# Allegro board CY8CKIT-042_Layout.brd
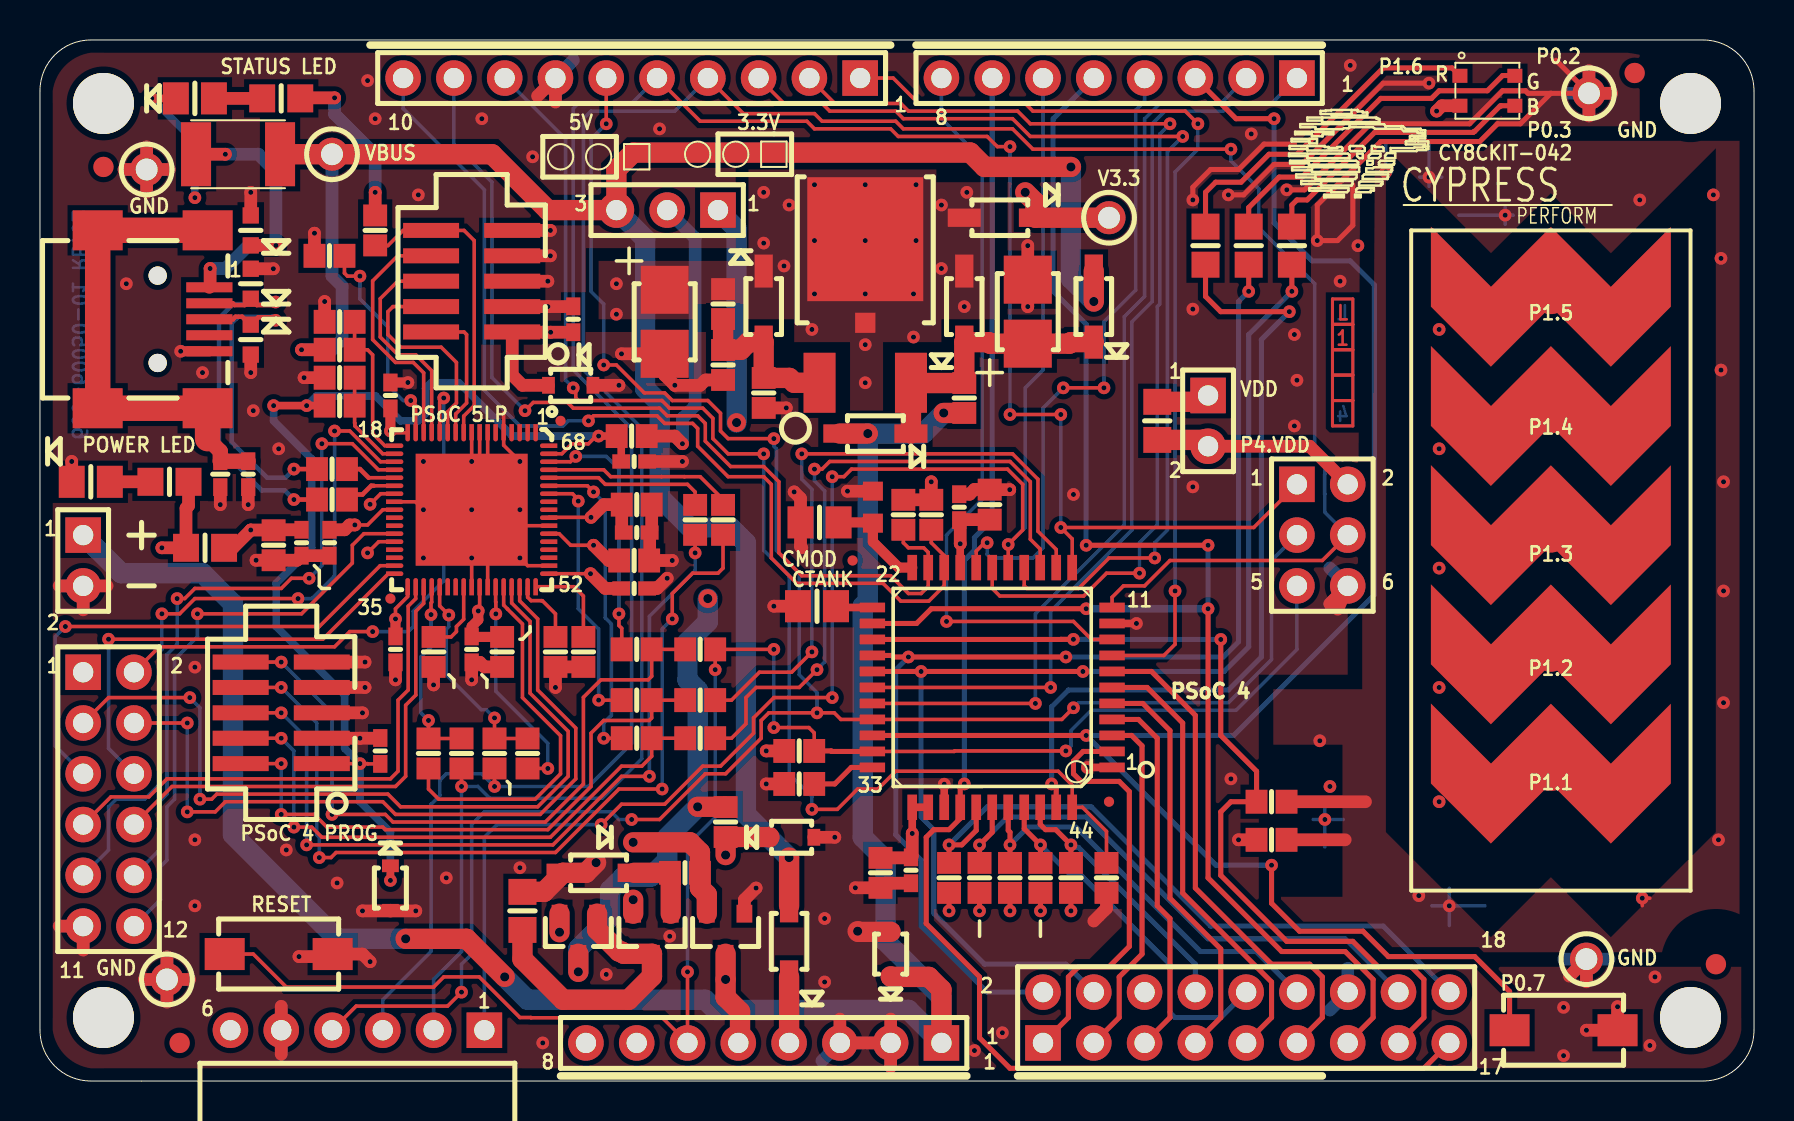
[diagram p0: board, top side]
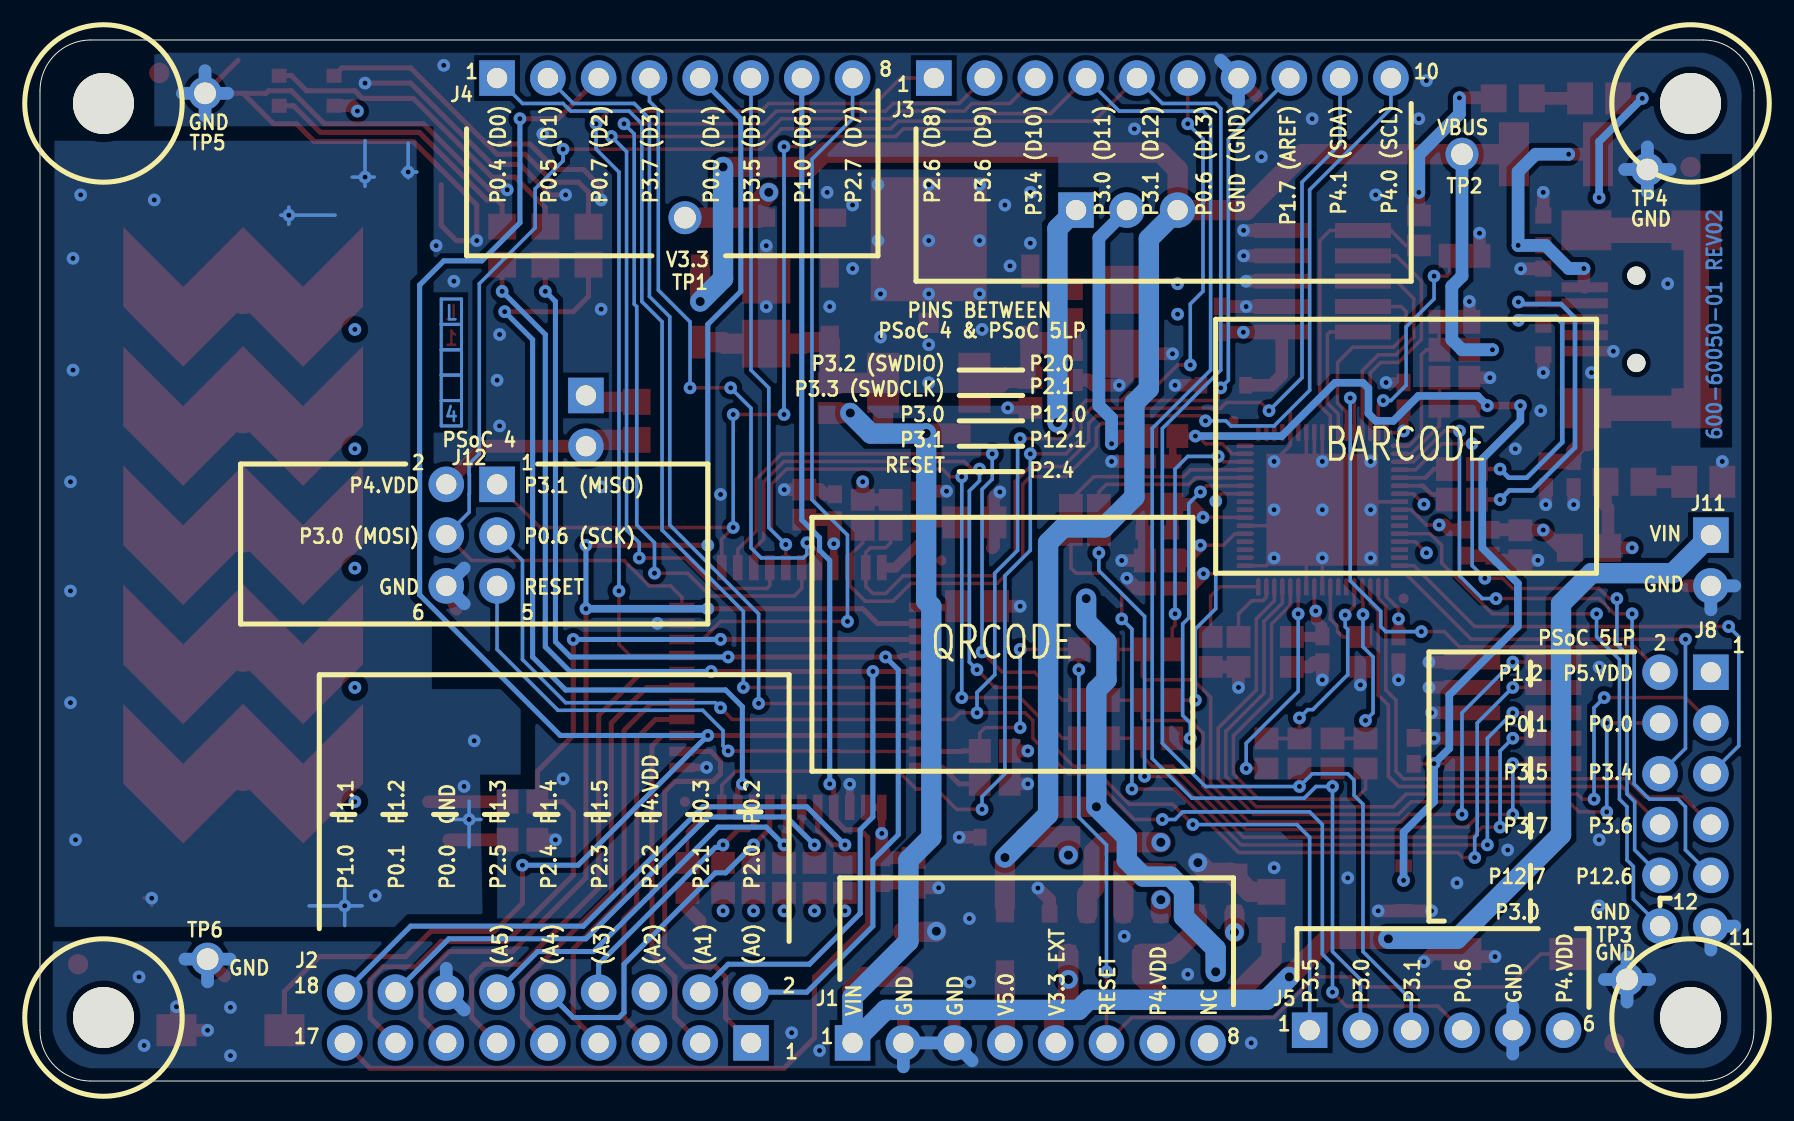
[diagram p1: board, bottom side, seen from below]

Outline 85.72 x 52.07 mm; copper layers: TOP, GND, VCC, BOTTOM. Coordinates in mm from the lower left corner of the outline.

## Placement (name value [footprint] x y rotation side)
C1  2200 pF  [C-CC0805]  38.99 27.94 180 top
C2  0.1 uF  [C-CC0402]  43.56 10.54 270 top
C3  1.0 uF  [C-CC0603]  42.04 10.41 270 top
C4  10 uFd 25v  [C-PCC3528]  49.4 38.48 90 top
C5  1.0 uF  [C-CC0603]  37.97 14.86 180 top
C6  22 uFd 16v  [C-PCC3528]  31.24 37.97 270 top
C7  0.1 uF  [C-CC0402]  45.97 28.7 90 top
C8  1.0 uF  [C-CC0603]  47.5 28.83 90 top
C9  2200 pF  [C-CC0805]  38.86 23.75 180 top
C10  1.0 uF  [C-CC0603]  53.34 10.16 90 top
C11  1.0 uF  [C-CC0603]  29.85 28.83 0 top
C12  0.1 uF  [C-CC0402]  29.85 27.43 0 top
C13  1.0 uF  [C-CC0603]  29.72 26.04 180 top
C14  0.1 uF  [C-CC0402]  29.72 30.99 0 top
C15  0.1 uF  [C-CC0402]  29.72 24.64 0 top
C16  0.01 uF  [C-CC0402]  10.41 30.35 270 top
C17  0.1 uF  [C-CC0402]  21.59 21.59 270 top
C18  1.0 uF  [C-CC0603]  23.11 21.46 270 top
C19  1.0 uF  [C-CC0603]  19.69 21.46 270 top
C20  0.1 uF  [C-CC0402]  17.53 34.29 90 top
C21  0.1 uF  [C-CC0402]  17.78 21.59 270 top
C22  0.1 uF  [C-CC0402]  14.48 26.92 270 top
C23  1.0 uF  [C-CC0603]  11.68 26.8 270 top
C24  0.1 uF  [C-CC0402]  13.08 26.92 270 top
C25  0.1 uF  [C-CC0402]  17.02 16.51 90 top
C26  1.0 uF  [C-CC0603]  36.2 34.42 270 top
C27  0.1 uF  [C-CC0402]  26.67 38.1 90 top
C28  1.0 uF  [C-CC0603]  25.78 21.46 270 top
C29  1.0 uF  [C-CC0603]  27.18 21.46 270 top
CSS1  CapSense Slider 5 Seg  [CSS5A-300MIL_4MMSHAPE]  75.56 27.3 270 top
D1  MBR0520L  [SOD-123]  46.23 38.73 90 top
D2  MBR0520L  [SOD-123]  52.7 38.73 90 top
D3  Power LED  [CR-LED0805]  2.54 29.97 0 top
D4  MBR0520L  [SOD-123]  37.46 6.98 90 top
D5  Vz=2V(BZT52C2V0-7-F)  [SOD-123-R]  27.94 10.41 180 top
D6  ESD 5VDC  [CR-LED0603]  10.54 42.54 90 top
D7  ESD 5VDC  [CR-LED0603]  10.54 39.88 90 top
D8  ESD 5VDC  [CR-LED0603]  10.54 37.08 270 top
D9  RGB LED  [LED_PLCC4_SMD]  72.39 49.53 0 top
D10  Status LED Green  [CR-LED0805]  7.75 49.15 0 top
D11  MBR0520L  [SOD-123]  48.01 43.18 180 top
D12  MBR0520L  [SOD-123]  36.2 38.73 270 top
D13  MBR0520L  [SOD-123]  41.78 32.38 180 top
F1  PTC Resettable Fuse  [FUSE_MF-MSMF050-2]  9.91 46.35 0 top
J1  8x1 RECP  [RECP8X1-VERT]  45.08 1.9 270 top
J2  9x2 RECP  [RECEPT_9X2_100MI]  50.16 1.9 90 top
J3  10X1 RECP  [RECP10X1-VERT]  41.02 50.16 270 top
J4  8x1 RECP  [RECP8X1-VERT]  62.86 50.16 270 top
J5  6X1 CONN FEMALE  [RECP6X1-RA]  22.23 2.54 180 top
J6  50MIL KEYED SMD  [FTSH-105-XX-X-DV-K]  12.07 18.41 90 top
J7  50MIL KEYED SMD  [FTSH-105-XX-X-DV-K]  21.59 40 90 top
J8  6x2 RECPT  [RECPT6X2_100]  2.16 20.45 0 top
J9  3p_jumper  [HDR3X1]  33.91 43.56 180 top
J10  USB MINI B  [J-ACON-MINIABSMT]  0.63 38.1 90 top
J11  2 PIN HDR  [HDR2]  2.16 27.3 180 top
J12  3x2 RECPT  [RECPT3X2_100]  62.86 29.85 0 top
J13  2 PIN HDR  [HDR2]  58.42 34.29 180 top
NOREF  -  []  2.54 52.07 0 top
NOREF#2  -  []  85.72 2.54 0 top
NOREF#3  -  []  193.68 -156.84 0 top
NOREF#4  -  [unnamed#2]  40.64 26.04 0 top
NOREF#5  -  [unnamed#4]  6.98 1.9 0 top
NOREF#6  -  []  3.17 3.17 0 top
NOREF#7  -  [unnamed#4]  83.82 5.84 0 top
NOREF#8  -  []  3.17 3.17 0 top
NOREF#9  -  []  0 2.54 0 top
NOREF#10  -  []  127.51 -114.68 0 top
NOREF#11  -  [unnamed#4]  3.17 45.72 0 top
NOREF#12  -  []  61.59 34.29 0 top
NOREF#13  -  []  -238.12 -233.04 0 top
NOREF#14  -  []  82.55 3.17 0 top
NOREF#15  -  [unnamed#2]  17.53 24.13 0 top
NOREF#16  -  [unnamed#3]  3.17 3.17 0 top
NOREF#17  -  [unnamed#2]  53.47 13.97 0 top
NOREF#18  -  []  3.17 48.89 0 top
NOREF#19  -  []  85.04 51.27 0 top
NOREF#20  -  []  5.08 0 0 top
NOREF#21  -  []  193.68 -156.84 0 top
NOREF#22  -  [unnamed#4]  79.76 50.42 0 top
NOREF#23  -  []  65.41 44.07 0 top
NOREF#24  -  [unnamed#2]  26.04 33.02 0 top
NOREF#25  -  []  82.55 48.89 180 bottom
NOREF#26  -  []  -111.12 -156.84 180 bottom
NOREF#27  -  []  3.17 48.89 180 bottom
NOREF#28  -  []  3.17 3.17 180 bottom
NOREF#29  -  []  82.55 3.17 180 bottom
NOREF#30  -  []  37.59 21.84 180 bottom
NOREF#31  -  []  17.4 31.75 180 bottom
Q1  PMOS( DMP3098L-7)  [SOT23-3098L]  34.29 7.37 180 top
Q2  PMOS( DMP3098L-7)  [SOT23-3098L]  26.92 7.37 180 top
Q3  PMOS( DMP3098L-7)  [SOT23-3098L]  30.61 7.37 180 top
R1  NO LOAD  [RESC1608X50AN]  41.66 28.7 270 top
R2  ZERO  [R-CR0603]  46.23 34.16 90 top
R3  330 ohm  [R-CR0805]  6.48 29.97 180 top
R4  ZERO  [R-CR0603]  29.59 32.26 0 top
R5  ZERO  [R-CR0805]  8.25 26.67 0 top
R6  ZERO  [R-CR0805]  55.88 33.02 270 top
R7  ZERO  [R-CR0603]  14.48 41.27 180 top
R8  2.2K  [R-CR0603]  43.18 28.32 270 top
R9  2.2K  [R-CR0603]  44.58 28.32 270 top
R10  4.7K  [R-CR0603]  37.97 16.51 0 top
R11  ZERO  [R-CR0603]  29.85 21.59 0 top
R12  ZERO  [R-CR0603]  34.16 28.07 270 top
R13  100K  [R-CR0402]  9.02 30.35 270 top
R14  ZERO  [R-CR0603]  32.77 28.07 270 top
R15  ZERO  [R-CR0603]  29.85 17.14 0 top
R16  ZERO  [R-CR0603]  29.85 19.05 0 top
R17  560 ohm  [R-CR0603]  45.47 10.16 90 top
R18  560 ohm  [R-CR0603]  46.99 10.16 90 top
R19  560 ohm  [R-CR0603]  48.51 10.16 90 top
R20  560 ohm  [R-CR0603]  50.04 10.16 90 top
R21  560 ohm  [R-CR0603]  51.56 10.16 90 top
R22  2.2K  [R-CR0603]  24.38 16.38 90 top
R23  2.2K  [R-CR0603]  19.43 16.38 90 top
R24  ZERO  [R-CR0603]  22.73 16.38 270 top
R25  ZERO  [R-CR0603]  21.08 16.38 270 top
R26  22E  [R-CR0603]  14.61 30.61 0 top
R27  22E  [R-CR0603]  14.61 29.08 0 top
R28  2.2K  [R-CR0805]  58.29 41.78 270 top
R29  560 ohm  [R-CR0805]  60.45 41.78 90 top
R30  560 ohm  [R-CR0805]  62.61 41.78 90 top
R31  330 ohm  [R-CR0805]  12.07 49.15 180 top
R32  ZERO  [R-CR0603]  33.02 19.05 0 top
R33  ZERO  [R-CR0603]  33.02 17.14 0 top
R34  ZERO  [R-CR0603]  33.02 21.59 0 top
R35  240 ohm  [R-CR0603]  34.16 35.81 90 top
R36  120 ohm  [R-CR0603]  34.16 38.86 90 top
R37  1.5K  [R-CR0603]  14.99 33.78 0 top
R38  3K  [R-CR0603]  14.99 35.18 180 top
R39  1.5K  [R-CR0603]  14.99 36.58 0 top
R40  3K  [R-CR0603]  14.99 37.97 180 top
R41  4.7K  [R-CR0603]  16.76 42.54 270 top
R42  1K ohm  [0805]  24.13 8.51 90 top
R43  442 ohm  [R-CR0603]  32.26 10.41 180 top
R44  ZERO  [R-CR0603]  61.59 13.97 0 top
R45  ZERO  [R-CR0603]  61.59 12.07 0 top
R46  ZERO  [R-CR0603]  34.29 12.95 90 top
SW1  EVQ-PE105K  [SWITCH-EVQ-PE105K_5MM]  11.94 6.35 0 top
SW2  EVQ-PE105K  [SWITCH-EVQ-PE105K_5MM]  76.2 2.54 0 top
TP1  RED  [TP-43R_S]  53.47 43.18 0 top
TP2  RED  [TP-43R_S]  14.61 46.35 0 top
TP3  BLACK  [TP-43R_S]  6.35 5.08 0 top
TP4  BLACK  [TP-43R_S]  5.33 45.59 0 top
TP5  BLACK  [TP-43R_S]  77.47 49.4 0 top
TP6  BLACK  [TP-43R_S]  77.34 6.1 0 top
TVS1  5V 350W  [SOD323]  17.53 9.65 270 top
TVS2  5V 350W  [SOD323]  26.54 34.8 0 top
TVS3  5V 350W  [SOD323]  37.59 12.19 0 top
TVS4  18V 350W  [SOD323]  42.54 6.35 90 top
U1  NCP1117DTARKG  [DPAK_4PIN]  41.27 34.92 0 top
U2  CY8C4245AXI-483 44TQFP  [TQFP44]  47.62 19.69 180 top
U3  CY8C5868LTI-LP039 QFN68  [QFN68_8X8MM]  21.59 28.57 270 top

## Library data of the parts
C1 = CAP
C2 C7 C12 C14 C15 C17 C20-C22 C24 C25 C27 = 0.1 uFd 0402: alternate symbols: (C-CC0402_A)
C3 C5 C8 C10 C11 C13 C18 C19 C23 C26 C28 C29 = 1_0.0 uFd 0603 X5R 25V 10%: alternate symbols: (C-CC0603_A)
C4 C6 = 10 uFd Tantalum 16v 3216_2
C9 = CAP: alternate symbols: (CAPC2012X140N,CAPC2012X140L,CAPC2012X140M)
C16 = 0_0.01 uFd 0402 X7R
CSS1 = CapSense Slider 5 Seg EXTEND
D1 D2 D4 D11-D13 = TMP_134158
D3 D10 = LED Green 0805
D5 = DIODE BREAKDOWN
D6-D8 = ESD 5VDC 0603
D9 = RGB_LED
F1 = FUSE
J1 J4 = 8x1 RECPT VERT_0
J2 = RECEPT 9X2 100 MIL
J3 = RCP 12x1 _0.100 GOLD TH
J5 = RECEPT 6x1  RA 100 MIL
J6 J7 = 10 Pin Header 50mil Keyed SMD
J8 = RECPT 4X2 100MIL_1
J9 = 3p_jumper
J10 = USB MINI AB Right Angle
J11 = 2 PIN Header _0
J12 = RECPT 4X2 100MIL_2
J13 = 2 PIN Header
Q1 = P DGS_1
Q2 Q3 = P DGS_2
R1 = RES
R2 R4 R7 R11 R12 R14-R16 R24 R25 R32-R34 R44-R46 = Zero ohm 0603_2: alternate symbols: (R-CR0603_A)
R3 R31 = 330 ohm 5% 0805_0
R5 R6 = 330 ohm 5% 0805_1
R8 R9 R22 R23 = 2_0.2K ohm 5% 0603: alternate symbols: (R-CR0603_A)
R10 R41 = 4.7K ohm 5% 0603: alternate symbols: (R-CR0603_A)
R13 = 100K ohm 5% 0402: alternate symbols: (R-CR0402_A)
R17-R21 R28-R30 R35-R40 R42 R43 = RESISTOR
R26 R27 = 24 ohm 5% 0603 _0
SW1 SW2 = SWITCH EVQ-PE105K 5.0mm
TP1-TP6 = TEST_POINT
TVS1-TVS4 = TVS 5V SOD-323_0
U1 = LM1117MPX-3_1.3 SOT223
U2 = PSOC4A_44_TQFP_1: alternate symbols: (tqfpa100)
U3 = CY8C5667LTI-LP008 QFN68

## Footprints (pads in the part's own frame, mm; a bottom-side part is the same pattern mirrored in y, then rotated)
0805
  rect 1.295x1.397 smd: 1(-0.953,0) 2(0.953,0)
C-CC0402
  rect 0.889x0.711 smd: 1(-0.648,0) 2(0.648,0)
C-CC0603
  rect 1.092x1.194 smd: 1(-0.749,0) 2(0.749,0)
C-CC0805
  rect 1.295x1.6 smd: 1(-0.953,0) 2(0.953,0)
C-PCC3528
  rect 2.4x2.4 smd: 1(-1.6,0) 2(1.6,0)
CR-LED0603
  rect 0.813x0.813 smd: 1(-0.749,0) 2(0.749,0)
CR-LED0805
  rect 1.295x1.6 smd: 1(-0.953,0) 2(0.953,0)
CSS5A-300MIL_4MMSHAPE
  custom 7x11.999 smd: 1(11.925,0) 2(5.961,0) 3(0,0) 4(-5.961,0) 5(-11.925,0)
DPAK_4PIN
  rect 1.6x3 smd: 1(-2.286,0) 3(2.286,0)
  rect 1.011x1.011 smd: 2(0,3)
  rect 5.799x6.2 smd: 4(0,7.181)
FTSH-105-XX-X-DV-K
  rect 0.749x2.799 smd: 1(-2.54,-2.029) 2(-2.54,2.029) 3(-1.27,-2.029) 4(-1.27,2.029) 5(0,-2.029) 6(0,2.029) 7(1.27,-2.029) 8(1.27,2.029) 9(2.54,-2.029) 10(2.54,2.029)
FUSE_MF-MSMF050-2
  rect 1.501x3.2 smd: 1(-2.101,0) 2(2.101,0)
HDR2
  rect 1.778x1.778 hole 1.016: 1(0,0)
  round 1.778 hole 1.016: 2(0,2.54)
HDR3X1
  rect 1.778x1.778 hole 1.016: 1(0,0)
  round 1.778 hole 1.016: 2(2.54,0) 3(5.08,0)
J-ACON-MINIABSMT
  round 0.914 hole 0.914 unplated: (-2.184,-5.25) (2.184,-5.25)
  rect 0.5x2.311 smd: 1(1.6,-7.836) 2(0.8,-7.836) 3(0,-7.836) 4(-0.8,-7.836) 5(-1.6,-7.836)
  rect 1.999x2.499 smd: 6(4.45,-2.25) 7(4.45,-7.75) 8(-4.45,-2.25) 9(-4.45,-7.75)
LED_PLCC4_SMD
  rect 0.749x0.701 smd: 1(-1.374,0.749) 2(-1.374,-0.749) 3(1.374,-0.749) 4(1.374,0.749)
QFN68_8X8MM
  custom 0.864x0.23 smd: 1(-3.851,3.2) 2(-3.851,2.799) 3(-3.851,2.4) 4(-3.851,1.999) 5(-3.851,1.6) 6(-3.851,1.199) 7(-3.851,0.8) 8(-3.851,0.399) 9(-3.851,0) 10(-3.851,-0.399) 11(-3.851,-0.8) 12(-3.851,-1.199) 13(-3.851,-1.6) 14(-3.851,-1.999) 15(-3.851,-2.4) 16(-3.851,-2.799) 17(-3.851,-3.2) 35(3.851,-3.2) 36(3.851,-2.799) 37(3.851,-2.4) 38(3.851,-1.999) 39(3.851,-1.6) 40(3.851,-1.199) 41(3.851,-0.8) 42(3.851,-0.399) 43(3.851,0) 44(3.851,0.399) 45(3.851,0.8) 46(3.851,1.199) 47(3.851,1.6) 48(3.851,1.999) 49(3.851,2.4) 50(3.851,2.799) 51(3.851,3.2)
  custom 0.23x0.864 smd: 18(-3.2,-3.851) 19(-2.799,-3.851) 20(-2.4,-3.851) 21(-1.999,-3.851) 22(-1.6,-3.851) 23(-1.199,-3.851) 24(-0.8,-3.851) 25(-0.399,-3.851) 26(0,-3.851) 27(0.399,-3.851) 28(0.8,-3.851) 29(1.199,-3.851) 30(1.6,-3.851) 31(1.999,-3.851) 32(2.4,-3.851) 33(2.799,-3.851) 34(3.2,-3.851) 52(3.2,3.851) 53(2.799,3.851) 54(2.4,3.851) 55(1.999,3.851) 56(1.6,3.851) 57(1.199,3.851) 58(0.8,3.851) 59(0.399,3.851) 60(0,3.851) 61(-0.399,3.851) 62(-0.8,3.851) 63(-1.199,3.851) 64(-1.6,3.851) 65(-1.999,3.851) 66(-2.4,3.851) 67(-2.799,3.851) 68(-3.2,3.851)
  rect 5.601x5.601 smd: 69(0,0)
R-CR0402
  rect 0.889x0.711 smd: 1(-0.648,0) 2(0.648,0)
R-CR0603
  rect 1.092x1.194 smd: 1(-0.749,0) 2(0.749,0)
R-CR0805
  rect 1.295x1.397 smd: 1(-0.953,0) 2(0.953,0)
RECEPT_9X2_100MI
  rect 1.778x1.778 hole 1.016: 1(0,0)
  round 1.778 hole 1.016: 2(2.54,0) 3(0,-2.54) 4(2.54,-2.54) 5(0,-5.08) 6(2.54,-5.08) 7(0,-7.62) 8(2.54,-7.62) 9(0,-10.16) 10(2.54,-10.16) 11(0,-12.7) 12(2.54,-12.7) 13(0,-15.24) 14(2.54,-15.24) 15(0,-17.78) 16(2.54,-17.78) 17(0,-20.32) 18(2.54,-20.32)
RECP6X1-RA
  rect 1.778x1.778 hole 1.016: 1(0,0)
  round 1.778 hole 1.016: 2(2.54,0) 3(5.08,0) 4(7.62,0) 5(10.16,0) 6(12.7,0)
RECP8X1-VERT
  rect 1.778x1.778 hole 1.016: 1(0,0)
  round 1.778 hole 1.016: 2(0,-2.54) 3(0,-5.08) 4(0,-7.62) 5(0,-10.16) 6(0,-12.7) 7(0,-15.24) 8(0,-17.78)
RECP10X1-VERT
  rect 1.778x1.778 hole 1.016: 1(0,0)
  round 1.778 hole 1.016: 2(0,-2.54) 3(0,-5.08) 4(0,-7.62) 5(0,-10.16) 6(0,-12.7) 7(0,-15.24) 8(0,-17.78) 9(0,-20.32) 10(0,-22.86)
RECPT3X2_100
  rect 1.778x1.778 hole 1.016: 1(0,0)
  round 1.778 hole 1.016: 2(2.54,0) 3(0,-2.54) 4(2.54,-2.54) 5(0,-5.08) 6(2.54,-5.08)
RECPT6X2_100
  rect 1.778x1.778 hole 1.016: 1(0,0)
  round 1.778 hole 1.016: 2(2.54,0) 3(0,-2.54) 4(2.54,-2.54) 5(0,-5.08) 6(2.54,-5.08) 7(0,-7.62) 8(2.54,-7.62) 9(0,-10.16) 10(2.54,-10.16) 11(0,-12.7) 12(2.54,-12.7)
RESC1608X50AN
  rect 0.95x1.001 smd: 1(-0.8,0) 2(0.8,0)
SOD323
  rect 0.635x0.838 smd: 1(-1.113,0) 2(1.113,0)
SOD-123
  rect 1.651x0.914 smd: 1(-1.778,0) 2(1.778,0)
SOD-123-R
  rect 1.651x0.914 smd: 1(1.778,0) 2(-1.778,0)
SOT23-3098L
  rect 0.787x0.889 smd: 1(0,1.003) 2(-0.94,-1.003) 3(0.94,-1.003)
SWITCH-EVQ-PE105K_5MM
  rect 1.999x1.6 smd: 1(-2.7,0) 2(2.7,0)
TP-43R_S
  round 1.651 hole 1.092: 1(0,0)
TQFP44
  rect 1.27x0.483 smd: 1(-5.994,4) 2(-5.994,3.2) 3(-5.994,2.4) 4(-5.994,1.6) 5(-5.994,0.8) 6(-5.994,0) 7(-5.994,-0.8) 8(-5.994,-1.6) 9(-5.994,-2.4) 10(-5.994,-3.2) 11(-5.994,-4) 23(5.994,-4) 24(5.994,-3.2) 25(5.994,-2.4) 26(5.994,-1.6) 27(5.994,-0.8) 28(5.994,0) 29(5.994,0.8) 30(5.994,1.6) 31(5.994,2.4) 32(5.994,3.2) 33(5.994,4)
  rect 0.483x1.27 smd: 12(-4,-5.994) 13(-3.2,-5.994) 14(-2.4,-5.994) 15(-1.6,-5.994) 16(-0.8,-5.994) 17(0,-5.994) 18(0.8,-5.994) 19(1.6,-5.994) 20(2.4,-5.994) 21(3.2,-5.994) 22(4,-5.994) 34(4,5.994) 35(3.2,5.994) 36(2.4,5.994) 37(1.6,5.994) 38(0.8,5.994) 39(0,5.994) 40(-0.8,5.994) 41(-1.6,5.994) 42(-2.4,5.994) 43(-3.2,5.994) 44(-4,5.994)
unnamed#2
  round 0.508 smd: (0,0)
unnamed#4
  round 1.016 smd: (0,0)
unnamed#3
  round 3.048 hole 3.175 unplated: (0,45.72) (0,0) (79.375,45.72) (79.375,0)

## Nets
GND_EARTH1: C16.1 J10.6(S1) J10.7(S2) J10.8(S3) J10.9(S4) R13.1
GND_SIGNAL: C1.2 C2.2 C3.2 C4.2 C5.2 C6.2 C7.2 C8.2 C9.2 C10.1 C11.2 C12.2 C13.1 C14.2 C15.2 C16.2 C17.2 C18.2 C19.2 C20.2 C21.2 C22.2 C23.2 C24.2 C25.2 C26.2 C27.2 C28.2 C29.2 D3.1(K) D5.1(ANODE) D6.2(ANODE) D7.2(ANODE) D8.2(ANODE) J1.2 J1.3 J2.14 J3.7 J5.5 J6.3 J6.5 J6.7 J6.9 J7.3 J7.5 J7.7 J7.9 J8.11 J10.5(GND) J11.2 J12.6 Q1.2(G) R1.1 R7.2 R13.2 R35.1 R38.2 R40.2 R42.2 R45.1 SW1.2(NC2) SW2.2(NC2) TP3.1 TP4.1 TP5.1 TP6.1 TVS1.2(A) TVS2.2(A) TVS3.2(A) TVS4.2(A) U2.1(VSS#1) U2.10(VSS#10) U2.36(VSSA) U3.5(VSSB) U3.7(VBOOST) U3.8(VBAT) U3.9(VSSD#9) U3.25(VSSD#25) U3.43(VSSA) U3.45(VSSD#45) U3.53(P0_4) U3.58(VSSD#58) U3.69(EPAD)
V3.3: D11.1(CATHODE) J9.1 Q2.1(D) R46.2 TP1.1
V3.3_EXT: J1.5 Q1.1(D) R46.1 TVS3.1(K)
VBUS: D2.2(ANODE) D4.2(ANODE) F1.2 J9.3 R39.1 TP2.1
VCCD: C5.1 U2.33(VCCD)
VDD: J9.2 J13.1 R3.1 R4.2 R5.1 R6.1
VIN: D13.2(ANODE) J1.1 J11.1 R2.1 TVS4.1(K)
/XRES: J1.6 J12.5 R10.2 R34.2 SW1.1(NC1) U2.32(X\R\E\S\)
DM: D7.1(CATHODE) J10.2(DM) R27.1
DM_P: R27.2 U3.23(P15_7 DM)
DP: D8.1(CATHODE) J10.3(DP) R26.1
DP_P: R26.2 U3.22(P15_6 DP)
P0_0: J2.13 J4.5 U2.24(P0_0)
P0_1: J2.15 R44.1 U2.25(P0_1)
P0_2: J2.2 R29.1 U2.26(P0_2)
P0_3: J2.4 R30.1 U2.27(P0_3)
P0_4: J4.1 U2.28(P0_4)
P0_5: J4.2 U2.29(P0_5)
P0_6: J3.6 J5.4 J12.3 U2.30(P0_6)
P0_7: J4.3 SW2.1(NC1) U2.31(P0_7)
P1_0: J2.17 J4.7 U2.37(P1_0)
P1_1: J2.18 R17.2 U2.38(P1_1)
P1_2: J2.16 R18.2 U2.39(P1_2)
P1_3: J2.12 R19.2 U2.40(P1_3)
P1_4: J2.10 R20.2 U2.41(P1_4)
P1_5: J2.8 R21.2 U2.42(P1_5)
P1_6: R28.2 U2.43(P1_6)
P1_7: C10.2 J3.8 U2.44(P1_7)
P2_0: J2.1 U2.2(P2_0)
P2_1: J2.3 U2.3(P2_1)
P2_2: J2.5 U2.4(P2_2)
P2_3: J2.7 U2.5(P2_3)
P2_4: J2.9 U2.6(P2_4)
P2_5: J2.11 U2.7(P2_5)
P2_6: J3.1 U2.8(P2_6)
P2_7: J4.8 U2.9(P2_7)
P3_0: J3.4 J5.2 J12.4 R25.2 U2.11(P3_0)
P3_1: J3.5 J5.3 J12.1 R24.2 U2.12(P3_1)
P3_4: J3.3 U2.15(P3_4)
P3_5: J4.6 J5.1 U2.16(P3_5)
P3_6: J3.2 U2.17(P3_6)
P3_7: J4.4 U2.18(P3_7)
P4_0: J3.10 R9.2 U2.20(P4_0)
P4_1: J3.9 R8.2 U2.21(P4_1)
P4_2: C1.1 R1.2 U2.22(P4_2)
P4_3: C9.1 U2.23(P4_3)
P4_VDD: C2.1 C3.1 C7.1 C8.1 D9.2 J1.7 J2.6 J5.6 J12.2 J13.2 R6.2 R8.1 R9.1 R10.1 U2.19(VDDD#19) U2.34(VDDD#34) U2.35(VDDA)
P5LP0_0: J8.3 U3.48(P0_0)
P5LP0_1: J8.4 U3.49(P0_1)
P5LP0_2: C28.1 U3.50(P0_2)
P5LP0_3: C29.1 U3.51(P0_3)
P5LP1_2: J8.2 U3.13(P1_2)
P5LP1_6: R39.2 R40.1 U3.18(P1_6)
P5LP1_7: R37.2 R38.1 U3.19(P1_7)
P5LP2_0: J6.2 R16.2 R32.1
P5LP2_1: J6.4 R15.2 R33.1
P5LP2_2: J6.6 R14.2
P5LP2_3: J6.8 R12.2
P5LP2_4: J6.10 R11.2 R34.1
P5LP3_0: J8.12 U3.29(P3_0)
P5LP3_1: D10.1(K) U3.30(P3_1)
P5LP3_4: J8.5 U3.33(P3_4)
P5LP3_5: J8.6 U3.34(P3_5)
P5LP3_6: J8.7 U3.36(P3_6)
P5LP3_7: J8.8 U3.37(P3_7)
P5LP12_0: R23.2 R25.1 U3.38(SIO, I2C1_SCL P12_0)
P5LP12_1: R22.2 R24.1 U3.39(SIO, I2C1_SDA P12_1)
P5LP12_2: R22.1 U3.46(SIO_P12_2)
P5LP12_3: R23.1 U3.47(SIO_P12_3)
P5LP12_6: J8.9 U3.20(P12_6_SIO)
P5LP12_7: J8.10 U3.21(P12_7_SIO)
P5LP_SWDCLK: J7.4 U3.12(P1_1)
P5LP_SWDIO: J7.2 U3.11(P1_0)
P5LP_SWO: J7.6 U3.14(P1_3)
P5LP_TDI: J7.8 U3.15(P1_4)
P5LP_VCCD: C13.2 C22.1 U3.26(VCCD#26) U3.57(VCCD#57)
P5LP_VDD: C11.1 C12.1 C15.1 C17.1 C18.1 C20.1 C21.1 C23.1 C24.1 C27.1 J7.1 J8.1 R5.2 R31.1 R41.1 TVS2.1(K) U3.17(VDDIO1) U3.24(VDDD#24) U3.35(VDDIO3) U3.44(VDDA) U3.52(VDDIO0) U3.59(VDDD#59)
P5LP_XRES: J7.10 R41.2 U3.10(XRES)
SHIELD: R44.2 R45.2
SWDCLK: R33.2 U2.14(P3_3_SWDCLK)
SWDIO: R32.2 U2.13(P3_2_SWDIO)
VTARG: C14.1 C25.1 J6.1 R4.1 R37.1 TVS1.1(K) U3.67(VDDIO2)
N14776252: CSS1.4 R20.1
N14776318: CSS1.1 R17.1
N14776322: CSS1.5 R21.1
N14776342: CSS1.3 R19.1
N14776346: CSS1.2 R18.1
N15481477: D6.1(CATHODE) F1.1 J10.1(VBUS)
N15489269: C26.1 D12.2(ANODE) R35.2 R36.1 U1.1(ADJ)
N15491926: D10.2(A) R31.2
N15496401: D9.4 R29.2
N15496459: D9.3 R30.2
N15496489: D9.1 R28.1
N15508824: C19.1 U3.42(VCCA)
N15592773: C6.1 D1.2(ANODE) D11.2(ANODE) D12.1(CATHODE) R36.2 U1.2(VOUT) U1.4(TAB)
N15592793: C4.1 D1.1(CATHODE) D2.1(CATHODE) D13.1(CATHODE) R2.2 U1.3(VIN)
N15658909: R14.1 U3.64(P2_2)
N15658913: R15.1 U3.63(P2_1)
N15658929: R16.1 U3.62(P2_0)
N15663560: D4.1(CATHODE) J1.4
N16581278: D3.2(A) R3.2
N16604133: Q1.3(S) Q2.3(S) Q3.3(S) R43.1
N16604141: D5.2(CATHODE) Q3.2(G) R43.2
N16604149: Q2.2(G) Q3.1(D) R42.1
N16675566: R12.1 U3.65(P2_3)
N16675623: R11.1 U3.66(P2_4)
N16682792: R7.1 U3.16(P1_5)

Pads without a net: J1 8; J10 4; U3 1 2 3 4 6 27 28 31 32 40 41 54 55 56 60 61 68

## Via types
v1: diameter 0.635, hole 0.254, TOP to BOTTOM, 299 vias
v2: diameter 0.94, hole 0.457, TOP to BOTTOM, 19 vias

## Routing (per net, layer and track width the routed paths; a pad name or vN(x,y) marks a point on that pad's centre or on a via; arc(x,y) is an arc through that point)
GND_EARTH1: length 24.2
  TOP w0.762: 8.38,32.13 9.02,31.5 R13.1 C16.1
  TOP w1.27: 8.38,32.13 8.38,33.65 J10.9 J10.8 J10.6 J10.7
GND_SIGNAL: length 295.7
  TOP w0.178: U3.9 v1(21.59,30.99) ; 23.19,33.43 U3.5 23.19,31.8 v1(24,30.99) ; U3.25 18.78,28.97 v1(19.18,28.57) ; U3.43 v1(21.59,26.16) 22.17,26.16 22.39,25.95 U3.45 ; 21.99,28.97 22.39,29.38 U3.7 ; 21.99,28.97 U3.8 ; 21.99,28.97 v1(21.59,28.57) 22.39,27.77 ; U3.53 24.39,25.78 v1(24,26.16) 22.39,27.77 ; 22.39,27.77 U3.58
  TOP w0.254: v1(69.47,49.91) 67.18,49.91 63.12,45.85 61.72,45.85 60.2,44.32 v1(59.44,44.32) ; v1(57.66,44.07) 57.66,44.7 58.55,45.59 59.94,45.59 61.21,46.86 62.74,46.86 ; 75.82,51.05 TP5.1 75.56,49.4 ; v1(62.36,44.58) 63.25,44.58 66.55,47.88 71.5,47.88 73.15,49.53 74.3,49.53 74.42,49.4 75.56,49.4 ; 75.56,49.4 74.04,47.88 72.9,47.88 72.01,46.99 67.06,46.99 63.88,43.81 v1(63.88,42.04) 64.9,42.04 65.66,42.8 65.66,44.83
  TOP w0.381: U2.10 v1(54.84,22.89) ; U2.1 v1(52.39,15.68) ; U2.36 v1(45.22,14.85)
  TOP w0.508: J10.5 v1(7.04,36.5) ; C20.2 v1(18.4,34.94)
  TOP w0.635: C15.2 30.86,24.64 v1(31.37,25.15) ; 77.47,48.27 TP5.1 ; TP5.1 78.6,49.4 ; TP5.1 77.47,50.54 ; v1(77.34,2.54) SW2.2 v1(78.9,3.72) ; 2.16,6.55 J8.11 0.96,7.75 ; 38.1,26.67 38.04,26.73 C1.2 38.04,29.15 v1(37.72,29.46) ; v1(49.4,38.73) C4.2 v1(49.4,41.78) ; TP4.1 5.33,46.73 ; TP4.1 6.47,45.59 ; TP4.1 4.2,45.59 ; TP4.1 5.33,44.46 ; J6.7 v1(16.26,19.69) ; v1(25.78,19.69) C28.2 C29.2 ; C18.2 22.23,20.71 22,20.94 C17.2 v1(21.59,20.07) ; C11.2 30.59,27.53 C12.2 30.49,26.06 C13.1 v1(31.62,26.04) ; 42.54,0.71 J1.2 ; J1.2 41.35,1.9 ; J1.2 42.54,3.1 ; 6.35,3.95 TP3.1 ; TP3.1 5.22,5.08 ; TP3.1 7.48,5.08 ; TP3.1 6.35,6.21 ; C2.2 42.27,9.89 C3.2 v1(40.78,9.66) ; v1(18.8,8.51) 17.56,8.51 TVS1.2 17.5,8.51 v1(16.13,8.51) ; R38.2 v1(13.21,35.18) ; TVS3.2 v1(39.75,12.19) ; Q1.2 35.23,9.07 v1(35.81,9.65) ; D7.2 v1(11.67,40.63) ; J7.3 v1(25.4,38.73) 26.66,38.73 C27.2 ; D3.1 v1(1.59,30.99) ; C7.2 46.49,29.35 46.74,29.59 47.49,29.59 C8.2 v1(48.5,29.58) ; 64.9,23.6 J12.6 64.51,23.87 ; R45.1 v1(59.94,12.07) ; J11.2 3.36,24.77 ; J11.2 2.16,23.57 ; J11.2 0.96,24.77 ; 41.2,1.9 J1.3 40,3.1 ; v1(29.08,36.37) C6.2 31.24,35.31 v1(31.75,34.8) 33.02,34.8 33.29,35.06 R35.1 ; J7.7 v1(25.53,41.27) ; D8.2 v1(10.54,35.43) ; C5.2 v1(36.32,14.86) ; 25.78,48.97 J3.7 24.88,49.27 ; J7.9 v1(25.53,42.54) ; C21.2 v1(17.78,20.07) ; R13.2 v1(9.02,28.83) ; C22.2 C24.2 12.85,26.05 C23.2 v1(10.81,26.05) ; 52.7,8 53.34,8.64 C10.1 ; R7.2 v1(13.73,42.41) ; C25.2 17.01,17.14 v1(16,17.14) J6.3 ; 77.34,4.96 TP6.1 76.49,5.25 ; R1.1 v1(40.39,29.5) ; C19.2 v1(19.69,19.81) ; J7.5 v1(25.4,40) ; J6.5 v1(16.13,18.41) ; C16.2 v1(10.41,28.83) ; D6.2 v1(10.54,44.45) ; v1(12.95,6.22) 14.51,6.22 SW1.2 16.13,6.35 v1(16.51,5.97) ; J6.9 v1(16.26,20.96) ; C26.2 v1(37.33,33.67) ; v1(32.13,30.99) C14.2 ; C9.2 v1(36.7,23.75) ; R40.2 v1(14.24,38.99) ; TVS2.2 v1(28.96,34.8) ; 12.07,3.74 12.07,1.34
  TOP w1.016: v2(27.81,10.92) 27.3,10.41 D5.1 25.21,9.46 R42.2 ; v2(40.89,7.49) 40.92,7.46 TVS4.2
  GND w0.635: TP4.1 5.33,46.66 ; TP4.1 4.26,45.59 ; TP4.1 5.33,44.52 ; TP4.1 6.4,45.59 ; TP5.1 78.54,49.4 ; TP5.1 77.47,50.47 ; TP5.1 77.47,48.33 ; TP5.1 76.4,49.4 ; 65.41,3.38 J2.14 ; J2.14 65.41,5.51 ; J2.14 64.34,4.45 ; J2.14 66.47,4.45 ; 2.16,6.68 J8.11 ; J8.11 3.23,7.75 ; J8.11 1.09,7.75 ; J8.11 2.16,8.82 ; 5.28,5.08 TP3.1 ; TP3.1 6.35,4.01 ; TP3.1 7.42,5.08 ; TP3.1 6.35,6.15 ; 64.34,24.77 J12.6 ; J12.6 65.41,23.7 ; J12.6 65.41,25.83 ; 41.48,1.9 J1.2 ; J1.2 43.61,1.9 ; J1.2 42.54,0.84 ; J1.2 42.54,2.97 ; 1.09,24.77 J11.2 ; J11.2 3.23,24.77 ; J11.2 2.16,25.83 ; J11.2 2.16,23.7 ; 76.27,6.1 TP6.1 ; TP6.1 78.41,6.1 ; TP6.1 77.34,5.03 ; J3.7 26.85,50.16 ; J3.7 25.78,49.1 ; J3.7 24.71,50.16 ; J1.3 41.07,1.9 ; J1.3 40,2.97 ; J1.3 38.94,1.9 ; 12.07,2.54 13.13,2.54 ; 12.07,2.54 11,2.54 ; 12.07,2.54 12.07,1.47 ; 12.07,2.54 12.07,3.61
  BOTTOM w0.635: 77.47,48.27 TP5.1 ; TP5.1 76.34,49.4 ; TP5.1 77.47,50.54 ; TP5.1 78.6,49.4 ; 12.07,1.34 12.07,3.74 ; 2.16,6.55 J8.11 0.96,7.75 ; TP4.1 5.33,46.73 ; TP4.1 4.2,45.59 ; TP4.1 6.47,45.59 ; TP4.1 5.33,44.46 ; 2.16,23.57 J11.2 0.96,24.77 ; 25.78,48.97 J3.7 26.68,51.06 ; TP3.1 7.48,5.08 ; TP3.1 6.35,6.21 ; TP3.1 5.22,5.08 ; TP3.1 6.35,3.95 ; 41.2,1.9 J1.3 39.11,1.01 ; 76.21,6.1 TP6.1 ; TP6.1 78.48,6.1 ; TP6.1 77.34,4.96 ; 64.51,3.55 J2.14 65.41,5.64 ; 64.51,23.87 J12.6 64.51,25.66 ; 42.54,0.71 J1.2 41.35,1.9
  vias: v1(4.32,39.88) v1(7.75,20.7) v1(7.75,12.07) v1(7.75,8.76) v1(8.13,35.43) v1(10.67,33.53) v1(11.94,31.62) v1(12.32,11.56) v1(14.86,9.91) v1(16.38,50.04) v1(16.76,48.13) v1(18.92,44.32) v1(19.18,30.99) v1(19.18,26.16) v1(20.32,10.16) v1(22.1,48.13) v1(24,28.57) v1(24,10.67) v1(24.64,46.23) v1(25.15,1.9) v1(28.32,5.33) v1(30.99,47.62) v1(31.5,7.24) v1(39.24,8.13) v1(39.24,4.95) v1(46.74,1.52) v1(48.13,2.41) v1(51.69,29.34) v1(57.66,38.61) v1(57.66,29.72) v1(59.56,15.11) v1(60.58,47.37) v1(62.74,37.34) v1(62.74,32.77) v1(62.86,35.05) v1(65.02,40) v1(65.53,50.8) v1(65.91,41.78) v1(76.2,3.68) v1(76.2,1.27) v1(80.52,1.78) v1(80.77,5.21)
V3.3: length 69.4
  TOP w1.016: TP1.1 D11.1 49.78,43.94 v2(49.28,44.45) ; v2(32.89,13.72) 34.28,13.72 R46.2 ; Q2.1 v2(26.92,5.46)
  VCC w1.016: J9.1 33.91,45.34 34.92,46.35 47.37,46.35 v2(49.28,44.45) ; v2(34.84,32.93) 34.84,31.2 35.56,30.48 35.56,26.29 v2(33.4,24.13)
  BOTTOM w1.016: v2(26.92,5.46) 26.92,6.62 28.51,8.21 28.51,9.55 29.19,10.22 30.54,10.22 31.37,11.05 31.37,12.19 v2(32.89,13.72) 32.89,19.56 32.38,20.07 32.38,21.96 33.4,22.97 v2(33.4,24.13) ; J9.1 34.84,42.63 v2(34.84,32.93)
V3.3_EXT: length 14.1
  TOP w1.016: J1.5 35.01,1.99 35.01,3.47 34.29,4.19 v2(34.29,5.08) Q1.1 ; TVS3.1 36.47,12.2 R46.1 v2(34.29,11.3)
  VCC w1.016: v2(34.29,11.3) v2(34.29,5.08)
VBUS: length 104.6
  TOP w0.635: R39.1 v1(13.08,36.58)
  TOP w1.016: v2(51.56,45.72) 47.24,45.72 46.53,46.44 29.67,46.44 28.83,45.59 J9.3 25.4,43.56 22.61,46.35 TP2.1 F1.2 ; D2.2 v2(52.7,38.99) ; D4.2 v2(37.46,11.18)
  BOTTOM w0.635: v1(13.08,36.58) 14.61,36.58 15.11,37.08 15.11,39.75 14.61,40.26 TP2.1
  BOTTOM w1.016: v2(37.46,11.18) 35.31,13.34 35.31,26.92 34.54,27.69 32.51,27.69 30.99,29.21 30.99,33.91 30.27,34.63 30.27,42.12 J9.3 ; v2(52.7,38.99) 51.56,40.13 v2(51.56,45.72)
VCCD: length 3.3
  TOP w0.254: U2.33 40.58,15.68 39.75,14.86 C5.1
VDD: length 28.1
  TOP w0.635: v1(32.13,31.88) 31.75,32.26 R4.2 ; v1(6.1,26.67) R5.1 7.3,28.65 7.43,28.78 R3.1
  TOP w1.016: R6.1 58.1,33.97 J13.1
  VCC w0.635: J13.1 59.49,34.29 ; J13.1 57.35,34.29 ; J13.1 58.42,35.36 ; 31.37,42.49 J9.2 ; J9.2 31.37,44.63 ; J9.2 30.3,43.56
  BOTTOM w0.635: J9.2 32.77,42.16 32.77,33.78 32.13,33.15 v1(32.13,31.88)
VIN: length 104.6
  TOP w1.016: D13.2 v2(41.4,32.38) ; J1.1 45.08,4.57 44.45,5.21 42.58,5.21 TVS4.1 ; v2(23.24,5.21) 21.34,7.11 v2(18.29,7.11) ; R2.1 v2(45.2,33.41)
  BOTTOM w1.016: v2(23.24,5.21) 24.38,4.06 33.27,4.06 33.78,3.56 43.43,3.56 J1.1 45.08,4.19 42.29,6.98 42.29,11.05 41.15,12.19 41.15,23.75 41.4,24 v2(41.4,32.38) 44.17,32.38 v2(45.2,33.41) ; J11.1 4.06,25.4 8.13,25.4 9.65,23.88 9.65,12.32 14.86,7.11 v2(18.29,7.11)
/XRES: length 85.4
  TOP w0.178: R10.2 38.72,17.41 38.46,17.68 v1(36.7,17.68) ; U2.32 45.72,16.48 45.75,16.51 v1(51.31,16.51) ; v1(32.38,5.46) J1.6 31.12,3.17 29.65,3.17 29.63,3.16 24.57,3.16 24.56,3.17 24,3.17 21.97,5.21 20.19,5.21 19.69,4.7 12.32,4.7 10.67,6.35 SW1.1 ; v1(33.77,20.57) R34.2 v1(36.7,21.59)
  TOP w0.254: R10.2 39.57,16.51 39.6,16.48 U2.32
  BOTTOM w0.178: v1(32.38,5.46) 32.38,11.81 33.77,13.2 v1(33.77,20.57) ; v1(36.7,17.68) v1(36.7,21.59) ; J12.5 62.86,21.59 59.82,18.54 52.58,18.54 51.56,17.53 51.56,16.76 v1(51.31,16.51)
DM: length 19.3
  TOP w0.229: v1(11.79,38.96) 11.63,38.81 10.85,38.81 10.54,39.12 ; J10.2 9.64,38.9 9.73,38.81 10.24,38.81 10.54,39.12 ; D7.1 10.54,39.12 ; R27.1 v1(12.7,29.08)
  BOTTOM w0.229: v1(12.7,29.08) 12.24,29.54 11.1,29.54 8.95,31.69 8.95,38.16 9.65,38.86 11.68,38.86 v1(11.79,38.96)
DM_P: length 2.7
  TOP w0.178: U3.23 16.69,29.77
  TOP w0.229: 16.69,29.77 16.57,29.77 16.13,29.34 15.61,29.34 R27.2
DP: length 17.3
  TOP w0.229: J10.3 9.65,38.1 9.78,38.23 10.11,38.23 10.5,37.83 D8.1 10.55,37.83 10.92,38.2 11.63,38.2 v1(11.79,38.05) ; R26.1 v1(12.7,30.61)
  BOTTOM w0.229: v1(11.79,38.05) 11.61,38.23 9.92,38.23 9.59,37.9 9.59,31.95 11.36,30.18 12.27,30.18 v1(12.7,30.61)
DP_P: length 2.6
  TOP w0.178: 16.43,30.18 U3.22
  TOP w0.229: 16.43,30.18 16,30.61 R26.2
P0_0: length 78.8
  TOP w0.254: v1(52.32,26.8) v1(58.42,26.8) ; v1(58.42,23.62) 58.42,10.16 62.1,6.48 65.28,6.48 66.67,5.08 66.67,3.17 J2.13 ; U2.24 43.84,22.89 44.58,23.62 v1(52.32,23.62)
  BOTTOM w0.254: J4.5 50.67,48.13 50.67,39.5 52.32,37.85 v1(52.32,26.8) ; v1(58.42,26.8) v1(58.42,23.62)
  BOTTOM w0.381: v1(52.32,23.62) v1(58.42,23.62)
P0_1: length 47.5
  TOP w0.254: U2.25 51.06,22.09 51.06,22.09 v1(51.69,22.09) ; v1(59.05,22.09) 59.05,17.28 60.85,15.49 R44.1 59.56,13.97 59.05,13.46 59.05,10.29 62.36,6.98 65.66,6.98 66.93,5.71 68.58,5.71 69.22,5.08 69.22,3.17 J2.15
  BOTTOM w0.254: v1(51.69,22.09) 52.31,22.09 52.32,22.09 v1(59.05,22.09)
P0_2: length 59.4
  TOP w0.254: v1(51.31,21.21) v1(43.43,21.21) 42.67,21.21 42.6,21.29 U2.26 ; v1(60.45,39.5) R29.1
  BOTTOM w0.254: v1(60.45,39.5) 59.94,38.99 59.94,21.97 59.18,21.21 v1(51.31,21.21) ; J2.2 47.37,4.45 44.07,7.75 44.07,11.05 42.8,12.32 42.8,20.57 v1(43.43,21.21)
P0_3: length 61.3
  TOP w0.254: U2.27 v1(44.07,20.49) v1(52.16,20.49) ; v1(62.61,39.5) R30.1
  BOTTOM w0.254: J2.4 51.31,5.84 47.24,5.84 44.7,8.38 44.7,12.57 44.07,13.21 v1(44.07,20.49) ; v1(62.61,39.5) 60.45,37.34 60.45,21.72 59.22,20.49 v1(52.16,20.49)
P0_4: length 47.4
  TOP w0.178: U2.28 v1(50.55,19.69)
  BOTTOM w0.178: v1(50.55,19.69) 50.55,23.5 54.61,27.56 54.61,37.97 55.63,38.99 55.63,47.88 56.26,48.51 59.18,48.51 59.56,48.89 61.59,48.89 J4.1
P0_5: length 45.6
  TOP w0.178: U2.29 v1(49.78,18.88)
  BOTTOM w0.178: J4.2 59.05,48.89 56.01,48.89 55.24,48.13 55.24,39.24 54.23,38.23 54.23,27.81 49.78,23.37 v1(49.78,18.88)
P0_6: length 107.2
  TOP w0.178: v1(29.59,13.08) 30.99,13.08 33.27,15.37 34.29,15.37 36.07,17.14 36.07,18.03 36.45,18.41 v1(38.86,18.41) 39.73,18.41 40.06,18.08 U2.30 51.1,18.08 v1(51.69,18.67) ; v1(21.08,4.45) 20.38,3.75 15.81,3.75 14.61,2.54 ; v1(28.19,35.81) 28.83,35.81 30.23,34.42 31.24,34.42 31.62,34.04 33.4,34.04 34.04,33.4 34.04,32.51 34.42,32.13 v1(36.7,32.13) ; v1(28.32,47.88) J3.6
  BOTTOM w0.178: v1(38.86,18.41) 38.86,19.43 37.97,20.32 37.97,25.4 36.83,26.54 36.83,31.62 36.7,31.75 v1(36.7,32.13) ; v1(28.19,35.81) 28.19,38.86 27.56,39.5 27.56,47.12 v1(28.32,47.88) ; v1(29.59,13.08) 28.96,13.08 28.57,13.46 22.23,13.46 21.59,12.83 21.59,6.35 21.08,5.84 v1(21.08,4.45) ; J12.3 61.59,26.04 61.59,21.08 59.44,18.92 51.94,18.92 v1(51.69,18.67)
P0_7: length 89.3
  TOP w0.254: J4.3 59.82,48.13 v1(61.72,48.13) ; v1(61.59,10.79) 61.59,8.89 62.99,7.49 66.17,7.49 67.44,6.22 71.75,6.22 73.5,4.48 SW2.1 ; U2.31 v1(52.32,17.28)
  BOTTOM w0.254: v1(61.72,48.13) 61.72,42.93 63.63,41.02 65.53,41.02 66.74,39.81 66.74,24.32 59.7,17.28 v1(52.32,17.28) 58.81,10.79 v1(61.59,10.79)
P1_0: length 75.6
  TOP w0.254: J2.17 69.22,0.63 48.51,0.63 46.99,2.16 46.99,5.21 44.32,7.87 44.32,12.19 44.7,12.57 45.47,12.57 46.02,13.13 U2.37 46.02,14.66 v1(46.23,14.86)
  BOTTOM w0.254: v1(46.23,14.86) 46.23,26.04 46.74,26.54 46.74,27.18 47.62,28.07 J4.7
P1_1: length 33.4
  TOP w0.254: U2.38 46.82,12.53 46.1,11.81 v1(45.47,11.81) R17.2
  BOTTOM w0.254: J2.18 67.18,7.75 58.55,7.75 52.58,13.72 47.37,13.72 v1(45.47,11.81)
P1_2: length 28.2
  TOP w0.254: R18.2 v1(46.99,11.81) 47.62,12.45 U2.39
  BOTTOM w0.254: J2.16 65.28,7.11 58.42,7.11 52.32,13.21 48.39,13.21 v1(46.99,11.81)
P1_3: length 21
  TOP w0.254: U2.40 48.43,12.53 48.51,12.45 v1(48.51,11.81) R19.2
  BOTTOM w0.254: J2.12 60.83,6.48 58.04,6.48 51.82,12.7 49.4,12.7 v1(48.51,11.81)
P1_4: length 18.9
  TOP w0.254: R20.2 v1(50.04,11.81) 49.23,12.62 U2.41
  BOTTOM w0.254: v1(50.04,11.81) 51.43,10.41 51.94,10.41 56.52,5.84 56.52,3.43 56.77,3.17 59.05,3.17 J2.10
P1_5: length 13.8
  TOP w0.254: U2.42 50.03,12.84 50.29,12.57 50.8,12.57 v1(51.56,11.81) R21.2
  BOTTOM w0.254: J2.8 57.78,5.84 51.94,11.68 51.69,11.68 v1(51.56,11.81)
P1_6: length 40.6
  TOP w0.254: v1(50.6,14.86) 50.83,14.63 U2.43 ; v1(62.48,38.48) 59.05,38.48 58.29,39.24 R28.2
  BOTTOM w0.254: v1(62.48,38.48) 61.09,37.08 61.09,21.21 59.44,19.56 51.43,19.56 50.6,18.72 v1(50.6,14.86)
P1_7: length 66.4
  TOP w0.178: v1(38.61,13.59) 39.88,13.59 40.89,14.61 41.91,14.61 42.8,15.49 50.93,15.49 51.63,14.8 U2.44 52.14,13.69 53.34,12.49 C10.2 ; v1(26.67,34.67) 26.8,34.54 26.8,34.16 26.92,34.04 31.1,34.04 31.49,33.66 33.15,33.66 33.66,33.15 33.66,32.13 34.42,31.37 v1(36.2,31.37)
  BOTTOM w0.178: v1(38.61,13.59) 38.61,14.22 37.46,15.37 37.46,25.27 36.2,26.54 v1(36.2,31.37) ; J3.8 26.29,47.12 26.29,35.05 v1(26.67,34.67)
P2_0: length 21.2
  TOP w0.254: U2.2 52.17,16.48 51.69,16 51.69,15.37 52.07,14.99 53.97,14.99 54.48,14.48 54.48,6.73 53.47,5.71 51.94,5.71 51.43,5.21 51.43,3.17 J2.1
P2_1: length 17.6
  TOP w0.254: U2.3 54.6,17.28 55.12,16.76 55.12,6.35 53.97,5.21 53.97,3.17 J2.3
P2_2: length 18.7
  TOP w0.254: U2.4 54.94,18.08 55.88,17.14 55.88,8.76 56.52,8.13 56.52,3.17 J2.5
P2_3: length 20.7
  TOP w0.254: U2.5 55.16,18.88 56.52,17.53 56.52,9.14 59.05,6.6 59.05,3.17 J2.7
P2_4: length 22.6
  TOP w0.254: J2.9 61.59,3.17 61.59,4.95 57.15,9.4 57.15,17.91 55.37,19.69 U2.6
P2_5: length 25.7
  TOP w0.254: J2.11 64.14,3.17 64.14,5.21 63.5,5.84 61.59,5.84 57.78,9.65 57.78,18.29 55.59,20.49 U2.7
P2_6: length 47.7
  TOP w0.178: v1(57.91,47.88) 57.28,48.51 49.66,48.51 49.28,48.89 43.94,48.89 42.67,50.16 J3.1 ; v1(56.77,24.51) 56.77,21.84 56.21,21.29 U2.8
  BOTTOM w0.178: v1(57.91,47.88) 57.91,46.61 56.77,45.47 v1(56.77,24.51)
P2_7: length 37.4
  TOP w0.178: v1(45.34,22.99) 51.69,22.99 52.59,22.09 U2.9
  BOTTOM w0.178: v1(45.34,22.99) 45.34,27.3 47.12,29.08 47.12,46.1 45.08,48.13 J4.8
P3_0: length 127
  TOP w0.178: R25.2 v1(21.08,14.73) ; J12.4 64.14,26.04 56.52,26.04 55.24,24.77 54.19,24.77 53.62,24.2 U2.11 ; v1(59.56,46.61) 49.66,46.61 48.64,47.62 43.18,47.62 42.8,48.01 39.12,48.01 38.73,48.39 35.18,48.39 J3.4
  BOTTOM w0.178: J12.4 64.26,28.45 64.26,29.35 64.25,29.36 64.25,30.33 64.26,30.34 64.26,30.86 63.75,31.37 63.75,39.88 60.96,42.67 60.96,44.63 59.56,46.02 v1(59.56,46.61) ; J3.4 31.75,48.51 27.56,48.51 27.18,48.13 27.18,35.56 30.1,32.64 30.1,16.13 28.12,14.15 22.49,14.15 21.9,14.73 v1(21.08,14.73) 21.08,6.48 19.69,5.08 19.69,2.54
P3_1: length 118.9
  TOP w0.178: v1(51.05,33.34) v1(48.51,33.34) ; J12.1 60.71,27.69 v1(51.05,27.69) 51.63,27.11 U2.12 ; J3.5 33.02,48.01 38.35,48.01 38.73,47.62 42.54,47.62 42.93,47.24 47.37,47.24 47.88,46.74 v1(48.51,46.74) ; R24.2 v1(22.73,14.73)
  BOTTOM w0.178: v1(51.05,33.34) v1(51.05,27.69) ; J3.5 29.59,48.89 26.92,48.89 26.67,48.64 26.67,35.56 29.59,32.64 29.59,16.89 27.43,14.73 v1(22.73,14.73) 22.1,15.37 20.32,15.37 20,15.05 20,14.29 19.56,13.84 19.56,6.48 17.14,4.06 17.14,2.54 ; v1(48.51,33.34) v1(48.51,46.74)
P3_4: length 52.2
  TOP w0.178: U2.15 49.23,24.78 49.36,24.64 51.94,24.64 53.47,26.16 v1(55.75,26.16) ; v1(57.15,47.24) 49.53,47.24 48.64,48.13 43.18,48.13 42.8,48.51 39.5,48.51 39.12,48.89 37.21,48.89 J3.3
  BOTTOM w0.178: v1(55.75,26.16) 55.75,26.92 56.39,27.56 56.39,46.48 v1(57.15,47.24)
P3_5: length 80
  TOP w0.178: v1(39.62,19.18) 36.7,19.18 35.69,18.16 35.69,17.4 34.04,15.75 33.15,15.75 31.24,13.84 29.08,13.84 v1(28.07,12.83) ; v1(39.62,30.23) 40.21,30.23 40.59,30.61 48.39,30.61 49.15,29.85 49.15,27.56 v1(48.43,26.84) U2.16
  BOTTOM w0.178: J5.1 22.23,12.19 22.86,12.83 v1(28.07,12.83) ; v1(39.62,30.23) v1(39.62,19.18) ; v1(48.43,26.84) 49.28,27.69 49.28,34.67 50.16,35.56 J4.6
P3_6: length 51.1
  TOP w0.178: U2.17 47.62,24.64 48.01,24.26 52.2,24.26 53.34,25.4 v1(54.99,25.4) ; v1(56.52,47.88) 49.53,47.88 48.89,48.51 43.43,48.51 43.05,48.89 39.75,48.89 J3.2
  BOTTOM w0.178: v1(56.52,47.88) 56.01,47.37 56.01,38.86 55.88,38.73 55.88,27.81 54.99,26.92 v1(54.99,25.4)
P3_7: length 32
  TOP w0.178: U2.18 46.82,26.5 47.24,26.92 v1(47.37,26.92) ; v1(53.21,34.67) v1(51.18,34.67)
  BOTTOM w0.178: v1(47.37,26.92) 47.37,26.34 47.55,26.16 49.66,26.16 50.16,26.67 50.16,33.66 v1(51.18,34.67) ; v1(53.21,34.67) 53.21,37.97 54.8,39.56 54.8,48.56 55.24,49.01 J4.4
P4_0: length 51.2
  TOP w0.178: R9.2 44.58,26.92 45.22,26.28 U2.20 45.22,24.78 44.45,24 43.05,24 42.16,24.89 37.85,24.89 36.58,26.16 36.58,29.85 36.2,30.23 34.42,30.23 32.89,31.75 32.89,32.64 32.64,32.89 31.24,32.89 30.86,33.27 27.69,33.27 v1(27.43,33.02)
  BOTTOM w0.178: v1(27.43,33.02) 26.42,33.02 26.16,32.77 24,32.77 22.23,34.54 22.23,44.58 18.16,48.64 J3.10
P4_1: length 49
  TOP w0.178: v1(24.26,33.53) 24.67,33.94 26.38,33.94 26.67,33.66 30.98,33.66 31.36,33.27 32.89,33.27 33.27,32.89 33.27,32 34.54,30.73 36.2,30.73 36.96,29.97 36.96,26.42 38.1,25.27 42.54,25.27 43.43,24.38 44.07,24.38 44.42,24.74 U2.21 44.42,26.44 44.2,26.67 43.43,26.67 43.18,26.92 R8.2
  BOTTOM w0.178: J3.9 20.7,46.86 22.61,44.96 22.61,35.18 v1(24.26,33.53)
P4_2: length 5.2
  TOP w0.508: U2.22 42.95,25.68 41.66,26.97 R1.2 41.62,27.94 C1.1
P4_3: length 1.8
  TOP w0.381: U2.23 39.88,23.69 C9.1
P4_VDD: length 61.2
  TOP w0.381: v1(43.62,12.38) U2.34 U2.35 ; U2.19 v1(46.02,26.87)
  TOP w0.635: R10.1 v1(36.32,16.51) ; v1(43.62,12.38) 43.62,11.25 C2.1 43.54,11.16 C3.1 ; v1(69.85,48.51) 70.12,48.78 D9.2 ; J13.2 63.5,31.75 J12.2 ; R8.1 R9.1 v1(44.58,29.97) ; v1(46.02,26.87) 46.02,28 C7.1 46,28.08 C8.1
  TOP w1.016: J13.2 58.1,32.07 R6.2
  VCC w0.635: J1.7 30.91,1.9 ; J1.7 29.85,2.97 ; J1.7 28.78,1.9 ; v1(69.85,48.51) 68.2,48.51 61.59,41.91 61.59,33.02 60.32,31.75 J13.2 ; 55.24,3.38 J2.6 ; J2.6 54.18,4.45 ; J2.6 56.31,4.45 ; 9.52,1.47 9.52,2.54 ; 9.52,2.54 10.59,2.54 ; 9.52,2.54 9.52,3.61 ; 9.52,2.54 8.46,2.54 ; J13.2 58.42,32.82 ; J13.2 57.35,31.75 ; J13.2 58.42,30.68
P5LP0_0: length 41.2
  TOP w0.178: J8.3 3.43,19.18 v1(7.49,19.18) ; v1(8,14.1) 8.59,14.1 8.84,14.35 17.4,14.35 18.03,13.72 24.89,13.72 26.42,15.24 26.42,17.49 24.51,19.4 24.51,22.99 23.59,23.91 U3.48
  BOTTOM w0.178: v1(8,14.1) 8,18.67 v1(7.49,19.18)
P5LP0_1: length 38.5
  TOP w0.178: v1(7.37,13.46) 8.76,13.46 9.27,13.97 17.14,13.97 17.78,13.34 25.02,13.34 26.8,15.11 26.8,17.65 24.89,19.56 24.89,23.11 23.99,24.02 U3.49 ; v1(7.37,17.91) J8.4
  BOTTOM w0.178: v1(7.37,13.46) v1(7.37,17.91)
P5LP0_2: length 3.4
  TOP w0.178: C28.1 25.78,23.37 25.13,24.02 25.09,24.02 25.09,24.03 24.56,24.03 24.39,24.2 U3.50
P5LP0_3: length 4.6
  TOP w0.178: U3.51 26.71,24.72 27.18,24.26 C29.1
P5LP1_2: length 28.8
  TOP w0.178: J8.2 5.97,21.72 14.73,21.72 15.49,22.48 v1(16.64,22.48) ; U3.13 19.99,33.96 v1(20.19,34.16)
  BOTTOM w0.178: v1(20.19,34.16) 20.19,25.02 18.67,23.5 18.67,22.73 18.41,22.48 v1(16.64,22.48)
P5LP1_6: length 7.7
  TOP w0.178: U3.18 17.25,31.78 16.64,32.38 16.64,36.32 16.38,36.58 R39.2 R40.1
P5LP1_7: length 5
  TOP w0.178: U3.19 17.14,31.37 15.75,32.77 15.75,32.9 15.74,32.92 R37.2 R38.1
P5LP2_0: length 29.9
  TOP w0.178: v1(12.07,13.34) 13.72,13.34 14.35,12.7 17.14,12.7 17.27,12.57 25.4,12.57 27.56,14.73 27.56,17.4 28.19,18.03 30.47,18.03 30.59,18.16 R16.2 R32.1 ; J6.2 v1(12.07,15.88)
  BOTTOM w0.178: v1(12.07,13.34) v1(12.07,15.88)
P5LP2_1: length 29.1
  TOP w0.178: J6.4 v1(12.07,17.14) ; v1(12.7,12.7) 13.59,12.7 14.1,12.19 25.53,12.19 29.08,15.75 30.1,15.75 30.59,16.24 R15.2 R33.1
  BOTTOM w0.178: v1(12.7,12.7) 12.7,16.51 v1(12.07,17.14)
P5LP2_2: length 40.7
  TOP w0.178: v1(30.48,15.24) 29.08,15.24 25.65,11.81 v1(13.34,11.81) ; R14.2 v1(32.77,26.42) ; J6.6 v1(12.07,18.41)
  BOTTOM w0.178: v1(30.48,15.24) 30.48,23.24 32.77,25.53 v1(32.77,26.42) ; v1(12.07,18.41) 13.34,17.14 v1(13.34,11.81)
P5LP2_3: length 44.6
  TOP w0.178: v1(13.97,11.18) 14.55,11.18 14.81,11.43 25.78,11.43 28.96,14.61 v1(31.12,14.61) ; v1(31.62,23.11) 31.62,24.38 32.64,25.4 33.91,25.4 34.16,25.65 R12.2 ; J6.8 v1(12.07,19.69)
  BOTTOM w0.178: v1(31.62,23.11) 31.12,22.61 v1(31.12,14.61) ; v1(13.97,11.18) 13.97,12.19 13.84,12.32 13.84,17.91 v1(12.07,19.69)
P5LP2_4: length 35.4
  TOP w0.178: v1(14.61,13.34) 17.27,13.34 17.65,12.95 25.27,12.95 27.18,14.86 27.18,19.19 28.05,20.07 30.42,20.07 30.59,20.24 R11.2 R34.1 ; v1(12.07,20.96) J6.10
  BOTTOM w0.178: v1(12.07,20.96) 14.61,18.41 v1(14.61,13.34)
P5LP3_0: length 29
  TOP w0.178: U3.29 16.2,27.38 15.62,26.8 15.62,25.91 13.08,23.37 v1(7.87,23.37)
  BOTTOM w0.178: v1(7.87,23.37) 7.87,22.23 6.73,21.08 6.73,14.1 6.35,13.72 6.35,11.05 6.03,10.73 6.03,9.08 J8.12
P5LP3_1: length 33.9
  TOP w0.178: v1(16.38,26.42) 16.94,26.97 U3.30
  TOP w0.381: v1(5.59,49.15) D10.1
  VCC w0.381: v1(16.38,26.42) 14.86,26.42 14.59,26.69 14.59,30.48 15.88,31.77 15.88,38.73 12.7,41.91 12.7,42.54 12.07,43.18 8.75,43.18 v1(7.75,44.18)
  BOTTOM w0.381: v1(5.59,49.15) 7.75,46.99 v1(7.75,44.18)
P5LP3_4: length 25.9
  TOP w0.178: U3.33 17.01,25.78 13.97,22.73 v1(1.27,22.73)
  BOTTOM w0.178: J8.5 0.76,16.76 0.76,22.23 v1(1.27,22.73)
P5LP3_5: length 22.9
  TOP w0.178: U3.34 17.42,25.37 14.15,22.1 v1(3.43,22.1)
  BOTTOM w0.178: v1(3.43,22.1) 3.43,16.64 J8.6
P5LP3_6: length 26.4
  TOP w0.178: U3.36 18.79,24.12 18.41,23.75 18.41,19.56 17.91,19.05 17.91,15.49 17.53,15.11 6.35,15.11 5.45,14.21 3.54,14.21 J8.7
P5LP3_7: length 24.4
  TOP w0.178: U3.37 19.19,23.89 18.8,23.5 18.8,19.3 18.29,18.8 18.29,15.24 17.78,14.73 6.6,14.73 J8.8
P5LP12_0: length 9.6
  TOP w0.178: v1(19.43,18.03) R23.2 R25.1 ; U3.38 19.59,23.95 19.56,23.91 v1(19.56,23.33)
  BOTTOM w0.178: v1(19.43,18.03) 19.05,18.41 19.05,21.21 19.56,21.72 v1(19.56,23.33)
P5LP12_1: length 10.6
  TOP w0.178: v1(22.73,18.16) R24.1 R22.2 ; v1(20.45,23.31) 19.99,23.76 U3.39
  BOTTOM w0.178: v1(20.45,23.31) 20.45,22.72 20.32,22.6 20.32,20.32 22.06,18.58 22.32,18.58 v1(22.73,18.16)
P5LP12_2: length 11.2
  TOP w0.178: R22.1 v1(25.4,15.63) ; v1(22.8,23.37) 22.8,23.95 22.79,23.96 U3.46
  BOTTOM w0.178: v1(22.8,23.37) 22.8,19.49 25.4,16.89 v1(25.4,15.63)
P5LP12_3: length 18.9
  TOP w0.178: U3.47 23.19,23.8 23.38,23.61 23.38,23.61 24.13,22.86 24.13,19.18 26.04,17.27 26.04,15.37 24.77,14.1 19.94,14.1 19.43,14.61 R23.1
P5LP12_6: length 35.9
  TOP w0.178: v1(6.1,23.37) 6.98,23.37 7.75,24.13 v1(12.91,24.13) ; v1(14.73,32.51) 15.49,32.51 17.03,30.98 U3.20
  BOTTOM w0.178: v1(14.73,32.51) 14.73,25.27 13.59,24.13 v1(12.91,24.13) ; J8.9 3.43,11.56 3.43,13.72 3.81,14.1 5.23,14.1 5.99,14.86 5.99,21.48 6.1,21.58 v1(6.1,23.37)
P5LP12_7: length 32.9
  TOP w0.178: v1(6.86,24.13) 7.24,24.13 7.75,24.64 12.07,24.64 12.57,25.15 v1(13.46,25.15) ; U3.21 16.92,30.57 15.62,31.88 v1(14.1,31.88)
  BOTTOM w0.178: v1(13.46,25.15) 14.1,25.78 v1(14.1,31.88) ; J8.10 5.97,11.56 5.97,13.97 6.35,14.35 6.35,21.34 6.86,21.84 v1(6.86,24.13)
P5LP_SWDCLK: length 11.1
  TOP w0.178: J7.4 17.65,38.73 17.4,38.48 17.4,37.34 18.03,36.7 20.07,36.7 20.83,35.94 20.83,33.91 20.39,33.47 U3.12
P5LP_SWDIO: length 7
  TOP w0.178: U3.11 20.79,33.36 21.34,33.91 21.34,37.34 21.21,37.46 J7.2
P5LP_SWO: length 11.2
  TOP w0.178: J7.6 17.89,40 17.02,39.13 17.02,37.21 17.91,36.32 18.8,36.32 19.59,35.53 U3.14
P5LP_TDI: length 12.6
  TOP w0.178: J7.8 17.89,41.27 16.64,40.02 16.64,37.08 17.78,35.94 18.67,35.94 19.19,35.42 U3.15
P5LP_VCCD: length 20.1
  TOP w0.178: U3.26 17.14,28.57 16.38,27.81 v1(15.75,27.81) ; v1(27.69,26.8) 26.54,26.8 25.96,27.38 U3.57
  TOP w0.635: v1(15.75,27.81) 15.48,27.81 15.24,27.57 C22.1 ; v1(27.69,26.8) 28.45,26.04 C13.2
  VCC w1.016: v1(15.75,27.81) 16.75,27.81 17.26,27.3 25.4,27.3 25.91,26.8 v1(27.69,26.8)
P5LP_VDD: length 43.9
  TOP w0.178: v1(16.51,28.85) 17.04,29.38 U3.24 ; v1(21.92,23.51) 21.99,23.58 U3.44 ; v1(27.56,28.19) 25.46,28.19 U3.59 ; U3.35 18.39,24.23 17.78,23.62 v1(17.78,23.11) ; U3.17 17.61,32.43 v1(17.53,32.51) ; U3.52 v1(27.53,25.37)
  TOP w0.508: C21.1 v1(17.78,23.11) ; C20.1 v1(17.53,32.51) ; C18.1 21.62,22.21 C17.1 21.59,22.73 21.92,23.06 v1(21.92,23.51)
  TOP w0.635: TVS2.1 24.13,34.8 23.62,35.31 J7.1 23.63,37.45 v1(25.54,37.45) C27.1 ; v1(27.53,25.37) 28.27,24.64 C15.1 ; v1(14.73,49.18) 13.05,49.18 R31.1 ; C12.1 29.1,27.53 C11.1 28.19,28.83 v1(27.56,28.19) ; C24.1 11.71,27.57 C23.1 11.67,27.56 v1(10.54,27.56) 9.65,26.67 R5.2 ; R41.1 v1(16.76,44.45)
  VCC w0.635: J8.1 3.23,20.45 ; J8.1 1.09,20.45 ; J8.1 2.16,21.52 ; J8.1 2.16,19.38
  BOTTOM w0.635: v1(14.73,49.18) 14.73,48.36 16.76,46.33 v1(16.76,44.45)
P5LP_XRES: length 15.3
  TOP w0.178: U3.10 21.19,33.26 21.72,33.78 21.72,42.04 21.21,42.54 J7.10 18.16,42.54 17.4,41.78 16.78,41.78 R41.2
SHIELD: length 27.2
  TOP w0.178: 80.51,9.14 v1(80.14,9.14) 80.14,8.77
  TOP w0.635: R45.2 65.28,12.07 ; R44.2 66.29,13.97
  GND w0.178: 83.69,44.07 v1(83.69,44.32) ; v1(83.69,44.32) 83.55,44.32 ; v1(83.69,44.32) 83.69,44.47 ; v1(83.69,44.32) 85,44.32
  BOTTOM w0.178: v1(67.31,45.47) 67.31,46.91 ; v1(67.31,45.47) 67.59,45.47 ; v1(67.31,45.47) 67.31,45.18 ; v1(67.31,45.47) 66.88,45.47 ; 63.68,13.08 v1(64.26,13.08) ; v1(64.26,13.08) 64.26,14 ; v1(64.26,13.08) 64.26,11.71 ; v1(64.26,13.08) 65.18,13.08 ; v1(70.48,8.76) 72.27,8.76 ; v1(70.48,8.76) 70.48,9.63 ; v1(70.48,8.76) 69.61,8.76 ; v1(70.48,8.76) 70.48,7.78 ; 73.28,42.85 v1(73.28,43.31) ; v1(73.28,43.31) 73.28,43.71 ; v1(73.28,43.31) 70.97,43.31 ; v1(73.28,43.31) 73.68,43.31 ; v1(69.47,45.21) 70.11,45.21 ; v1(69.47,45.21) 69.47,44.75 ; v1(69.47,45.21) 69.01,45.21 ; v1(69.47,45.21) 69.47,47.03
  vias: v1(64.01,17.02) v1(64.52,14.73) v1(68.96,9.27) v1(80.01,44.07) v1(83.95,12.07) v1(84.07,41.15) v1(84.07,35.56) v1(84.2,29.97) v1(84.2,24.51) v1(84.2,18.92)
SWDCLK: length 33.6
  TOP w0.178: v1(38.86,20.57) 37.97,19.69 35.81,19.69 35.31,19.18 35.31,17.87 34.58,17.14 R33.2 ; U2.14 50.03,26.6 49.53,27.1 49.53,29.97 48.51,30.99 39.5,30.99 39.12,30.61 v1(38.73,30.61)
  BOTTOM w0.178: v1(38.73,30.61) 38.73,30.02 39.24,29.51 39.24,20.96 v1(38.86,20.57)
SWDIO: length 33.1
  TOP w0.178: R32.2 34.58,19.05 35.98,20.45 37.59,20.45 v1(38.61,21.46) ; U2.13 50.83,26.58 49.91,27.5 49.91,30.1 48.64,31.37 v1(38.1,31.37)
  BOTTOM w0.178: v1(38.1,31.37) 38.1,30.1 38.61,29.59 v1(38.61,21.46)
VTARG: length 56.9
  TOP w0.178: v1(27.94,32.26) 27.81,32.26 27.43,31.87 26.6,31.87 26.1,31.37 U3.67 ; J6.1 v1(16,15.88) 16.38,15.88 16.39,15.86 C25.1
  TOP w0.381: v1(11.68,33.78) v1(13.34,33.78) R37.1 ; C14.1 29.07,32.03 R4.1 v1(27.94,32.26) ; v1(17.53,10.03) TVS1.1
  BOTTOM w0.381: v1(27.94,32.26) 23.62,32.26 20.96,34.92 19.56,34.92 19.29,34.65 19.29,33.38 18.92,33.02 18.03,33.02 16.79,34.27 13.82,34.27 v1(13.34,33.78) ; v1(17.53,10.03) 17.53,12.45 16,13.97 v1(16,15.88) 15.24,16.64 15.24,19.3 11.81,22.73 11.81,24.89 13.59,26.67 13.59,31.12 11.68,33.02 v1(11.68,33.78)
N14776252: length 39.2
  TOP w0.254: R20.1 v1(50.04,8.51)
  VCC w0.254: v1(69.98,31.62) 67.31,28.96 67.31,24.13 62.99,19.81 62.99,10.92 59.69,7.62 50.93,7.62 v1(50.04,8.51)
N14776318: length 31
  TOP w0.254: R17.1 v1(45.47,8.51)
  VCC w0.254: v1(45.47,8.51) 48.26,5.71 63.5,5.71 68.58,10.79 68.58,12.57 v1(69.98,13.97)
N14776322: length 45.3
  TOP w0.254: R21.1 v1(51.56,8.51)
  VCC w0.254: v1(69.98,37.59) 69.35,37.59 69.23,37.46 68.83,37.46 67.56,36.2 67.56,32.26 67.06,31.75 62.1,31.75 60.96,30.61 60.96,10.79 58.67,8.51 v1(51.56,8.51)
N14776342: length 36.4
  TOP w0.254: R19.1 v1(48.51,8.51)
  VCC w0.254: v1(69.98,25.65) 68.58,24.26 68.58,22.86 66.04,20.32 66.04,12.07 60.96,6.98 50.04,6.98 v1(48.51,8.51)
N14776346: length 34
  TOP w0.254: R18.1 v1(46.99,8.51)
  VCC w0.254: v1(69.98,19.69) 69.22,19.69 67.31,17.78 67.31,11.43 62.23,6.35 49.15,6.35 v1(46.99,8.51)
N15481477: length 14
  TOP w0.635: D6.1 v1(11.8,41.8) ; v1(8.51,40.64) 8.51,39.74 J10.1 ; F1.1 v1(9.27,46.35)
  BOTTOM w0.635: v1(9.27,46.35) 10.92,46.35 11.8,45.48 v1(11.8,41.8) 10.43,41.8 9.27,40.64 v1(8.51,40.64)
N15489269: length 8.4
  TOP w1.016: R36.1 R35.2 34.18,36.58 35.05,36.58 35.43,36.96 D12.2 C26.1 37.48,35.17 37.72,34.92 U1.1
N15491926: length 2.4
  TOP w0.635: D10.2 R31.2
N15496401: length 17
  TOP w0.254: D9.4 73.75,50.29 73.15,50.29 72.39,49.53 69.98,49.53 69.6,49.15 67.06,49.15 63.12,45.21 61.98,45.21 60.45,43.69 R29.2
N15496459: length 14.3
  TOP w0.254: D9.3 73.08,48.78 73.07,48.77 73.02,48.77 71.75,47.5 71.73,47.5 71.68,47.45 66.75,47.45 63.37,44.07 62.86,44.07 62.61,43.81 R30.2
N15496489: length 17.2
  TOP w0.254: R28.1 58.29,44.45 58.8,44.96 60.07,44.96 61.47,46.35 62.86,46.35 67.18,50.67 70.62,50.67 D9.1
N15508824: length 3.6
  TOP w0.178: C19.1 20.56,22.21 20.83,22.48 20.83,22.73 21.19,23.1 U3.42
N15592773:
  vias: v1(28.83,39.88) v1(28.83,38.35) v1(36.2,44.45) v1(36.2,41.91) v1(37.21,40.77) v1(37.46,43.81) v1(38.61,37.59) v1(38.73,44.83) v1(38.73,42.04) v1(38.73,39.37) v1(41.27,44.83) v1(41.27,42.04) v1(41.27,39.37) v1(41.27,36.83) v1(41.27,34.92) v1(43.69,39.37) v1(43.69,37.21) v1(43.81,44.83) v1(43.81,42.04) v1(45.08,43.81) v1(45.08,40.64) v1(46.23,38.73) v1(46.35,44.45)
N15592793: length 13.8
  TOP w1.016: D2.1 51.56,36.96 51.49,36.88 C4.1 47.52,36.88 47.44,36.96 D1.1 R2.2 43.57,34.91 U1.3 D13.1
N15658909: length 8.3
  TOP w0.178: U3.64 27.94,30.18 28.27,29.85 32.38,29.85 32.77,29.46 R14.1
N15658913: length 16.1
  TOP w0.178: R15.1 v1(28.19,17.14) ; v1(27.69,29.46) 27.38,29.77 U3.63
  BOTTOM w0.178: v1(28.19,17.14) 28.19,17.91 28.57,18.29 28.57,22.86 28.27,23.16 28.27,28.88 v1(27.69,29.46)
N15658929: length 13.2
  TOP w0.178: v1(26.92,29) 26.92,29.09 26.63,29.38 U3.62 ; R16.1 v1(27.94,19.05)
  BOTTOM w0.178: v1(26.92,29) 26.92,23.62 27.94,22.61 v1(27.94,19.05)
N15663560: length 3.3
  TOP w1.016: J1.4 D4.1
N16581278: length 2
  TOP w0.635: R3.2 D3.2
N16604133: length 16.1
  TOP w1.016: Q1.3 33.35,9.32 33.01,9.66 R43.1 33.01,11.44 32.51,11.94 v2(29.67,11.94) ; Q2.3 v2(25.98,7.44) ; Q3.3 v2(29.67,9.07)
  VCC w1.016: v2(29.67,11.94) v2(29.67,9.07) 26.85,9.07 26.04,8.25 26.04,7.49 v2(25.98,7.44)
N16604141: length 3.9
  TOP w1.016: Q3.2 31.55,10.38 R43.2 D5.2
N16604149: length 14.4
  TOP w1.016: R42.1 24.13,6.1 26.16,4.06 29.44,4.06 30.61,5.23 Q3.1 29.2,6.36 29.08,6.48 28.96,6.48 27.86,7.57 Q2.2
N16675566: length 9.6
  TOP w0.178: U3.65 28.19,30.57 28.54,30.23 31.07,30.23 31.08,30.23 32.23,30.23 32.24,30.23 33.02,30.23 34.16,29.08 R12.1
N16675623: length 13
  TOP w0.178: v1(28.96,23.37) 28.96,22.78 29.1,22.64 R11.1 ; U3.66 26.53,30.98 v1(26.8,31.24)
  BOTTOM w0.178: v1(28.96,23.37) 28.96,30.61 28.32,31.24 v1(26.8,31.24)
N16682792: length 10.9
  TOP w0.178: v1(16,40.26) 15.38,40.26 15.23,40.41 R7.1 ; v1(18.54,34.04) 18.79,33.79 U3.16
  BOTTOM w0.178: v1(16,40.26) 16,39.12 17.4,37.72 17.4,34.8 18.16,34.04 v1(18.54,34.04)

## Copper pours and planes (outline as drawn; the poured copper is in the pictures)
GND_SIGNAL on TOP: 2.56,0.63 1.27,1.27 0.63,2.56 0.63,3.16 0.64,3.17 0.64,48.89 0.63,48.91 0.63,49.51 1.27,50.8 2.56,51.43 3.16,51.43 3.17,51.43 79.38,51.43 79.69,51.39 80.01,51.33 80.01,47.75 66.67,47.75 66.67,20.32 60.96,20.32 60.96,14.61 62.86,14.61 62.86,5.71 64.14,5.75 64.52,5.37 64.52,5.25 64.59,5.25 64.6,5.27 64.96,5.5 65.38,5.59 65.47,5.66 65.45,5.77 65.42,5.79 66.04,5.71 85.09,5.71 85.09,3.17 85.09,3.16 85.09,2.56 84.45,1.27 83.17,0.63 82.57,0.63 82.55,0.64 69.85,0.64 69.85,0.63 24.13,0.63 24.13,0.64 3.17,0.64 3.16,0.63 ; 62 cut-outs
GND_SIGNAL on BOTTOM: 2.56,0.63 1.27,1.27 0.63,2.56 0.63,3.16 0.64,3.17 0.64,24.51 0.63,40 0.64,40 0.64,48.89 1.07,50.56 2.56,51.43 3.16,51.43 3.17,51.43 79.38,51.43 79.69,51.39 80.01,51.33 80.01,47.75 66.04,47.75 66.04,28.89 65.4,28.7 64.76,28.89 64.66,28.9 64.61,28.81 64.61,28.59 64.87,28.32 64.91,28.34 65.48,28.45 66.04,28.26 66.04,23.75 65.41,23.75 65.41,20.32 60.96,20.32 60.96,14.61 62.86,14.61 62.86,6.98 85.09,6.98 85.09,3.17 85.09,3.16 85.09,2.56 84.45,1.27 83.17,0.63 82.57,0.63 82.55,0.64 69.85,0.64 69.85,0.63 24.13,0.63 24.13,0.64 3.17,0.64 3.16,0.63 ; 36 cut-outs
